# EAGLE board cap (EAGLE 6.5.0)
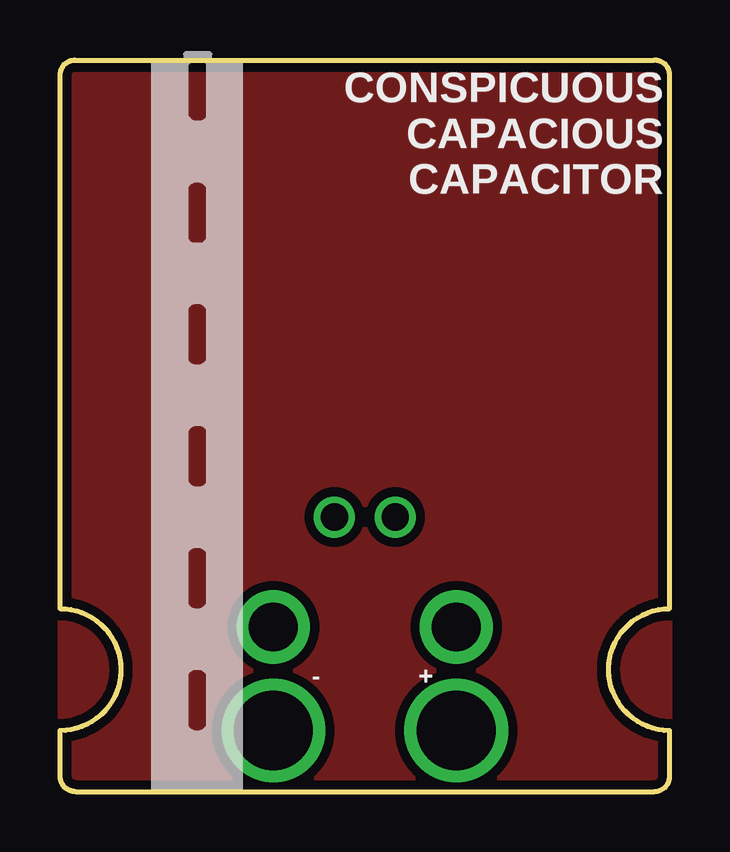
[diagram p0: board, top side]
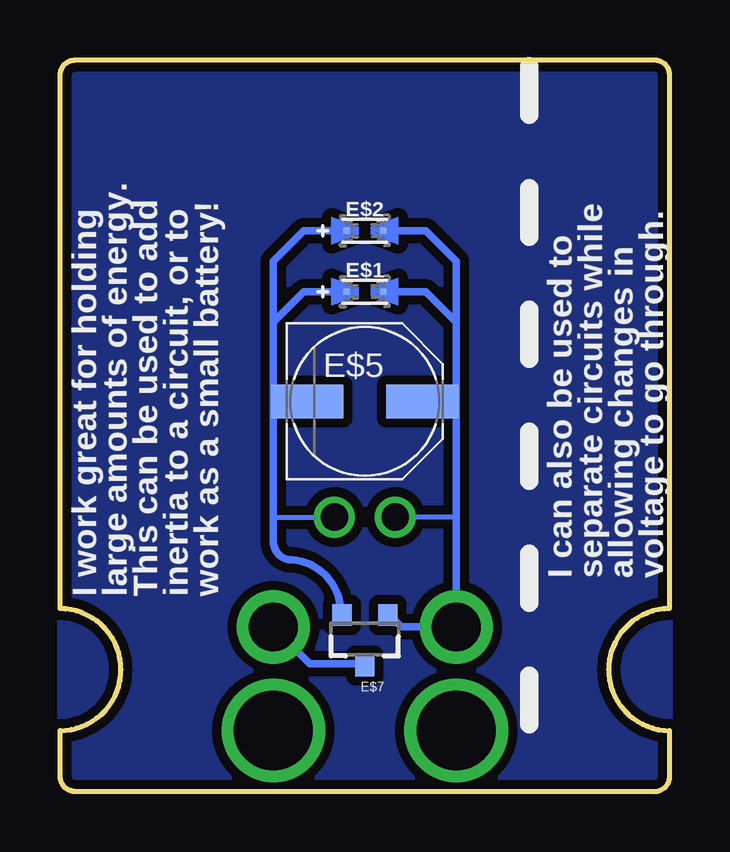
[diagram p1: board, bottom side, seen from below]

Size 25.4 x 30.48 mm. Coordinates in mm from the lower left corner, seen from the top.
Outline: 0.64,0 24.77,0 arc90 25.4,0.64 25.4,2.54 arc-90 22.86,5.08 arc-90 25.4,7.62 25.4,29.84 arc90 24.77,30.48 0.64,30.48 arc90 0,29.84 0,7.62 arc-90 2.54,5.08 arc-90 0,2.54 0,0.64 arc90 0.64,0
Copper layers (1*16): Top 0.035mm / dielectric 1.5mm / Bottom 0.035mm
Design rules "default *": minimum track width 10mil, minimum drill 0.6mm, track to track 8mil, track to pad 8mil, pad to pad 8mil, via to via 8mil, smd to smd 8mil, copper to edge 10mil, drill to drill 8mil, minimum pad ring 10mil, minimum via ring 8mil, stop-mask expansion 4mil, vias tented up to drill 0mil, thermal gap 10mil

## Footprints (pad centres in the part's own frame; a part is rotated, then mirrored left to right if it is on the bottom)
0402-0603-0805-UNIVERSAL = smd 0.254 x 0.254: + -0.762,0; - 0.762,0
PANASONIC_D = smd 3 x 1.4: + 2.4,0; - -2.4,0
SOT23-3 = smd 0.8 x 0.9: 1 -0.95,-1; 2 0.95,-1; 3 0,1.1

## Placement (x,y rotation side)
E$1  [0402-0603-0805-UNIVERSAL]  12.7,20.83 0 bottom
E$2  [0402-0603-0805-UNIVERSAL]  12.7,23.37 0 bottom
E$5  [PANASONIC_D]  12.7,16.26 0 bottom
E$7  [SOT23-3]  12.7,6.35 180 bottom

## Library data of the parts
E$1 E$2 E$5 E$7 = tekdemo

## Tracks (layer width: path | path; a pad name or v marks a point on that pad's centre or on a via)
S$1  (via drill 3.3)
  other vias: 8.89,2.54
S$2  (via drill 3.3)
  other vias: 16.51,2.54
S$3  (via drill 1.14 pad 1.52, 2.03)
  Bottom 0.203: 8.89,11.43 v11.43,11.43
  Bottom 0.305: 8.89,19.56 8.89,11.43 v8.89,6.86 11.18,6.86 11.68,7.37 | 8.89,19.56 8.89,22.1 10.16,23.37 11.43,23.37 | 11.43,20.83 10.16,20.83 8.89,19.56
S$4  (via drill 2.03)
  Bottom 0.305: v16.51,6.86 14.99,5.33 12.7,5.33
S$5
  pour Bottom (isolate 0.381, rank 6): 0,0 25.4,0 25.4,30.48 0,30.48
S$6  (via drill 1.14 pad 1.52)
  Bottom 0.203: 16.51,11.43 v13.97,11.43
  Bottom 0.305: 13.72,7.37 arc-90 15.75,9.65 arc90 16.51,10.41 16.51,11.43 16.51,19.56 | 16.51,19.56 16.51,22.1 15.24,23.37 13.97,23.37 | 13.97,20.83 15.24,20.83 16.51,19.56
S$7
  pour Top (isolate 0.381, rank 6): 0,0 25.4,0 25.4,30.48 0,30.48

## Text on the board
tPlace: CONSPICUOUS / CAPACIOUS / CAPACITOR | - | +
bPlace: I can also be used to / separate circuits while / allowing changes in / voltage to go through. | I work great for holding / large amounts of energy. / This can be used to add / inertia to a circuit, or to / work as a small battery!